# Altium PCB IndAlarmIf2.PCBDOC (part 2 of 2)
Units mil, origin at the board's own origin, x right, y up, seen from the top; angles counter-clockwise.
Board outline 5790 x 4460 mil, 2 copper layers (Top Layer, Bottom Layer); 118 components, 184 nets, 640 pads, 242 vias.
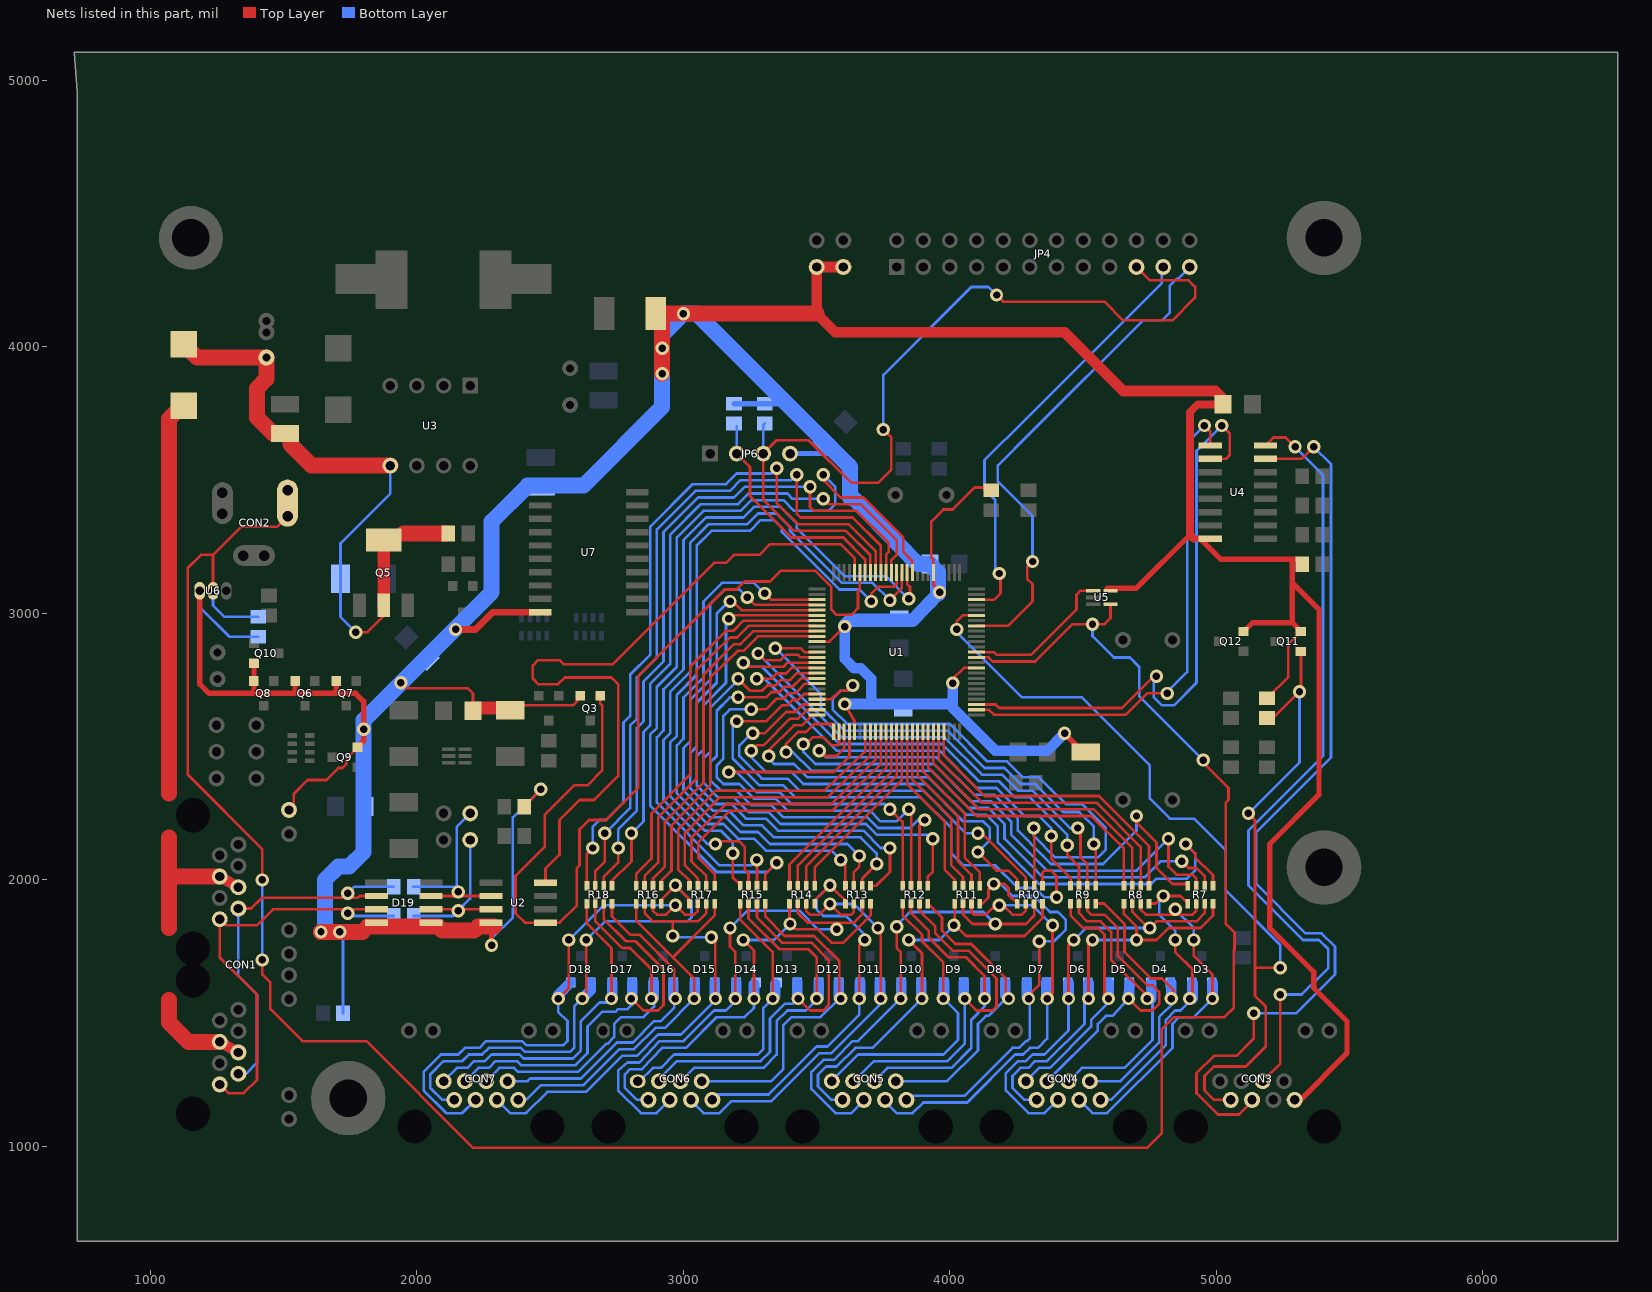
[diagram p2: the nets of this part, all layers, seen from the top]

## Via types
v1: diameter 50, hole 28, Top Layer to Bottom Layer, 242 vias

## Nets (pads, with @x,y where several pads share a name; then routed paths per layer and width w, separated by ;. In a path a pad name is that pad's centre, name@x,y a point inside that pad or via, vN(x,y) a via of type N, cw(c..) or ccw(c..) an arc to the next point about the centre after c; other vN are vias at no path point) (continued)
RXD: Q3.1 U1.45 U2.1 | length 3507.4
  Top Layer w10: Q3.1@2687.4,2696.26 2687.4,2662.6 2695,2655 2695,2410 2640,2355 2590,2355 2480,2245 2480,2125 2370,2015 2370,1980 2370,1875 2405,1840 U2.1@2482.36,1840 2535,1840 2600,1905 2600,2045 2610,2055 2610,2190 2645,2225 2710,2225 2830,2345 2830,2765 3155,3090 3200,3090 3230,3120 3325,3120 3365,3160 3495,3160 3555,3100 3555,3015 3575,2995 3630,2995 3655,3020 3655,3085.59 3662.2,3092.8 U1.45@3662.2,3154.21
RXD2: U1.2 U4.9 | length 1903.5
  Top Layer w10: U1.2@4099.21,2638.46 4146.54,2638.46 4165,2620 4630,2620 4660,2620 4740,2700 v1(4815,2700) ; v1(4955,3705) 4976.65,3683.35 U4.9@4976.65,3630
  Bottom Layer w10: v1(4815,2700) 4815,2705 4890,2780 4890,3640 v1(4955,3705)
RXDE: CON3.4 U4.8 | length 2986.6
  Top Layer w10: CON3.4@5173.54,1244.8 5240,1311.26 v1(5240,1570) ; U4.8@5183.35,3630 5213.35,3660 5260,3660 v1(5295,3625)
  Bottom Layer w10: v1(5240,1570) 5320,1570 5420,1670 5420,1740 5385,1775 5325,1775 5120,1980 5120,2185 5400,2465 5400,3520 v1(5295,3625)
RXDT: CON2.1 CON2.1A CON2.1B R3.1 U1.12 U5.4 U6.2 | length 9226.3
  Top Layer w10: U6.2@1235,3085 1235,3220 ; v1(1420,1700) 1420,1645 1450,1615 1450,1515 1570,1395 1810,1395 2210,995 4740,995 4795,1050 4795,1440 4840,1485 5030,1485 5065,1520 5065,1735 5067.5,1737.5 5067.5,1802.5 5035,1835 5035,2290 5045,2300 5045,2345 4950,2440 v1(4950,2450) ; v1(1420,2000) 1420,2115 1140,2395 1140,3170 1190,3220 1235,3220 ; CON2.1A@1514.37,3364.8 1474.37,3324.8 1339.8,3324.8 1235,3220 ; U1.12@4099.21,2835.31 4144.69,2835.31 4160,2820 4320,2820 4460,2960 4580,2960 4602.48,2982.48 U5.4@4602.48,3034.41
  Bottom Layer w10: U6.2@1235,3085 1235,3030 1277.6,2987.4 R3.1@1405,2987.4 ; v1(1420,1700) v1(1420,2000) ; v1(4535,2960) 4535,2915 4615,2835 4675,2835 4710,2800 4710,2690 v1(4950,2450)
S0A: R7.8 U1.78 | length 2046.3
  Top Layer w10: v1(3510,2485) 3530,2465 3575,2465 3603.15,2493.15 U1.78@3603.15,2555.79 ; v1(4700,2240) 4700,2215 4775,2140 4775,2045 4835,1985 4886.22,1985 R7.8@4892.76,1978.46
  Bottom Layer w10: v1(3510,2485) 3535,2460 3950,2460 4090,2320 4165,2320 4225,2260 4255,2230 4255,2185 4350,2090 4380,2060 4575,2060 4700,2185 v1(4700,2240)
S0AE: CON4.1 D3.2 R7.1 R8.8 | length 1274.2
  Top Layer w10: R8.8@4747.24,1911.54 4771.53,1911.54 v1(4800,1940) 4864.29,1940 R7.1@4892.76,1911.54 ; v1(4845,1775) 4845,1730 4910,1665 v1@4910,1555
  Bottom Layer w10: CON4.1@4563.5,1174.8 4564.8,1174.8 CON4.1@4580,1190 ; CON4.1@4569.8,1174.8 CON4.1@4565.2,1174.8 4604.8,1174.8 4810,1380 4810,1475 4845,1510 4865,1510 4910,1555 v1@4910,1540 ; v1(4800,1940) 4785,1925 4785,1870 4845,1810 v1(4845,1775) ; D3.2@4907.6,1615.79 D3.2@4910,1613.39
  Bottom Layer w40: v1@4910,1555 D3.2@4910,1613.39
  other v1: 4900,1555
S0B: R9.1 U1.63 | length 1888.3
  Top Layer w10: v1(3345,2870) 3440,2870 3455,2855 U1.63@3500.79,2855 ; v1(4540,2135) 4547.24,2127.76 4547.24,2067.24 R9.1@4547.24,1978.46
  Bottom Layer w10: v1(3345,2870) 3515,2700 3515,2650 3605,2560 3990,2560 4130,2420 4205,2420 4265,2360 4320,2360 4425,2255 4485,2255 4540,2200 v1(4540,2135)
S0BE: CON4.2 D4.1 R9.8 | length 1090.8
  Top Layer w10: R9.8@4547.24,1911.54 4578.47,1911.54 4655,1835 4655,1730 4755,1630 4795,1630 4840,1585 v1@4840,1555
  Bottom Layer w10: CON4.2@4523.5,1244.8 CON4.2@4523.5,1246.5 ; CON4.2@4525.2,1244.8 4639.8,1244.8 4785,1390 4785,1485 4840,1540 v1@4840,1555 ; D4.1@4827.4,1615.79 D4.1@4830,1613.19
  Bottom Layer w40: v1(4830,1555) D4.1@4830,1613.19
S0IN: R8.1 U1.97 | length 1148.2
  Top Layer w10: U1.97@3977.17,2555.79 3977.17,2467.83 4130,2315 4560,2315 4747.24,2127.76 R8.1@4747.24,1978.46
S1A: R7.7 U1.77 | length 2123.2
  Top Layer w10: v1(3450,2510) 3460,2510 3485,2535 3525,2535 3555,2505 3570,2505 3580,2505 3583.46,2508.46 U1.77@3583.46,2555.79 ; v1(4820,2155) 4820,2050 4850,2020 4910,2020 4924.25,2005.75 R7.7@4924.25,1978.46
  Bottom Layer w10: v1(3450,2510) 3450,2480 3495,2435 3940,2435 4080,2295 4155,2295 4215,2235 4230,2220 4230,2170 4325,2075 4365,2035 4700,2035 v1(4820,2155)
S1AE: CON4.3 D3.1 R7.2 R8.7 | length 1483.8
  Top Layer w10: R8.7@4715.75,1911.54 4715,1890 4735,1870 4910,1870 4924.25,1884.25 R7.2@4924.25,1911.54 ; v1(4915,1775) 4915,1715 4985,1645 v1(4985,1555)
  Bottom Layer w10: CON4.3@4483.5,1174.8 CON4.3@4485.2,1174.8 4535,1125 4590,1125 4835,1370 4835,1460 4860,1485 4915,1485 v1(4985,1555) ; v1(4845,1890) 4915,1820 v1(4915,1775) ; D3.1@4982.4,1615.79 4985,1613.19 D3.1@4982.4,1615.79
  Bottom Layer w40: v1(4985,1555) D3.1@4985,1613.19
S1B: R9.2 U1.64 | length 1946.1
  Top Layer w10: v1(3280,2850) 3305,2825 3365,2825 3385,2845 3430,2845 3439.69,2835.31 U1.64@3500.79,2835.31 ; v1(4480,2195) 4490,2185 4490,2085 4515.75,2059.25 R9.2@4515.75,1978.46
  Bottom Layer w10: v1(3280,2850) 3595,2535 3980,2535 4120,2395 4195,2395 4255,2335 4310,2335 4355,2290 4450,2195 v1(4480,2195)
S1BE: CON4.6 D5.1 R9.7 | length 1184.8
  Top Layer w10: R9.7@4515.75,1911.54 4515.75,1884.25 4530,1870 4580,1870 4630,1820 4630,1715 4740,1605 4760,1605 4785,1580 4785,1535 4760,1510 4715,1510 v1(4670,1555)
  Bottom Layer w10: CON4.6@4365.2,1244.8 4365.2,1245.2 4555,1435 4555,1460 4585,1490 4610,1490 v1(4670,1555) ; D5.1@4672.4,1615.79 D5.1@4675,1613.19
  Bottom Layer w40: v1(4670,1555) D5.1@4675,1613.19
S1IN: R8.2 U1.96 | length 1143.3
  Top Layer w10: U1.96@3957.48,2555.79 3957.48,2452.52 4120,2290 4550,2290 4715.75,2124.25 R8.2@4715.75,1978.46
S2A: R7.6 U1.76 | length 2168.8
  Top Layer w10: v1@3385,2460 3385,2510 3430,2555 3460,2555 3490,2585 3560,2585 3563.78,2581.22 U1.76@3563.78,2555.79 ; v1(4870,2070) 4895,2045 4925,2045 4956,2014 R7.6@4956,1978
  Bottom Layer w10: v1(3385,2480) 3410,2480 3480,2410 3930,2410 4070,2270 4145,2270 4205,2210 4205,2155 4300,2060 4350,2010 4730,2010 4790,2070 v1(4870,2070)
S2AE: CON4.5 D6.2 R7.3 R8.6 | length 1749.2
  Top Layer w10: v1(4445,1555) 4445,1745 4445,1755 v1(4465,1775) ; R8.6@4684,1912 4684,1881 4745,1820 v1(4750,1820) ; v1@4740,1820 v1(4750,1820) ; R7.3@4955.75,1911.54 4955.75,1875.75 4925,1845 4775,1845 v1(4750,1820)
  Bottom Layer w10: CON4.5@4403.5,1153.5 CON4.5@4403.5,1174.8 ; CON4.5@4405.2,1174.8 4404.8,1174.8 4355,1125 4295,1125 4210,1210 4210,1275 4255,1320 4285,1320 4310,1345 4355,1345 4445,1435 v1(4445,1555) ; D6.2@4442.6,1615.79 D6.2@4445,1613.39 ; v1(4465,1775) 4510,1820 v1(4750,1820)
  Bottom Layer w40: v1(4445,1555) D6.2@4445,1613.39
S2B: R9.3 U1.65 | length 2008.8
  Top Layer w10: v1@3215,2825 3240,2800 3375,2800 3390.63,2815.63 U1.65@3500.79,2815.63 ; v1(4440,2130) 4440,2095 4470,2065 4484.25,2050.75 R9.3@4484.25,1978.46
  Bottom Layer w10: v1@3215,2825 3240,2800 3295,2800 3585,2510 3970,2510 4110,2370 4185,2370 4245,2310 4300,2310 4345,2265 4440,2170 v1(4440,2130)
  other v1: 3225,2815
S2BE: CON4.4 D4.2 R9.6 | length 1117.5
  Top Layer w10: R9.6@4484,1912 4484,1876 4515,1845 4565,1845 4605,1805 4605,1700 v1@4750,1555
  Bottom Layer w10: CON4.4@4430,1260 4443.5,1246.5 CON4.4@4443.5,1244.8 ; CON4.4@4445.2,1244.8 4445.2,1245.2 4495,1295 4655,1295 4760,1400 4760,1545 v1@4750,1555 ; D4.2@4752.6,1615.79 D4.2@4755,1613.39
  Bottom Layer w40: v1@4755,1555 D4.2@4755,1613.39
  other v1: 4740,1555
S2IN: R8.3 U1.95 | length 1138.4
  Top Layer w10: U1.95@3937.8,2555.79 3937.8,2437.2 3990,2385 4110,2265 4540,2265 4684.25,2120.75 R8.3@4684.25,1978.46
S3A: R7.5 U1.75 | length 2430.1
  Top Layer w10: v1(3320,2465) 3320,2485 3415,2580 3445,2580 3483.78,2618.78 U1.75@3500.79,2618.78 ; v1(4885,2135) 4920,2100 4920,2085 4987.24,2017.76 R7.5@4987.24,1978.46
  Bottom Layer w10: v1(3320,2465) 3320,2455 3340,2435 3415,2435 3465,2385 3920,2385 4060,2245 4135,2245 4180,2200 4180,2140 4275,2045 4335,1985 4755,1985 4775,2005 4890,2005 4920,2035 4920,2100 v1(4885,2135)
S3AE: CON4.7 D6.1 R7.4 R8.5 | length 1584.8
  Top Layer w10: v1(4520,1555) 4520,1750 4520,1760 v1(4535,1775) ; R8.5@4652.76,1911.54 4652.76,1872.24 4700,1825 v1(4700,1775) 4775,1775 4820,1820 4940,1820 4987.24,1867.24 R7.4@4987.24,1911.54
  Bottom Layer w10: CON4.7@4325.2,1174.8 4280.2,1174.8 4235,1220 4235,1265 4265,1295 4295,1295 4320,1320 4365,1320 4505,1460 4505,1540 v1(4520,1555) ; D6.1@4517.4,1615.79 D6.1@4520,1613.19 ; v1(4535,1775) v1(4700,1775)
  Bottom Layer w40: v1(4520,1555) D6.1@4520,1613.19
S3B: R9.4 U1.66 | length 1826.4
  Top Layer w10: v1(3275,2755) 3330,2755 3350,2775 3385,2775 3405.94,2795.94 U1.66@3500.79,2795.94 ; v1(4380,2165) 4380,2080 4452.76,2007.24 R9.4@4452.76,1978.46
  Bottom Layer w10: v1(3275,2755) 3305,2755 3575,2485 3960,2485 4100,2345 4175,2345 4235,2285 4280,2240 4335,2240 4380,2195 v1(4380,2165)
S3BE: CON4.8 D5.2 R9.5 | length 982.8
  Top Layer w10: R9.5@4452.76,1911.54 4452.76,1867.24 4500,1820 4555,1820 4580,1795 4580,1570 v1(4595,1555)
  Bottom Layer w10: CON4.8@4283.5,1244.8 CON4.8@4289.8,1244.8 ; CON4.8@4285.2,1244.8 4285.2,1245.2 4335,1295 4375,1295 4530,1450 4530,1475 4595,1540 v1(4595,1555) v1@4600,1555 ; D5.2@4595,1613.19 D5.2@4597.6,1615.79
  Bottom Layer w40: v1(4595,1555) D5.2@4595,1613.19
S3IN: R8.4 U1.94 | length 1133.5
  Top Layer w10: U1.94@3918.11,2555.79 3918.11,2421.89 3980,2360 4100,2240 4530,2240 4652.76,2117.24 R8.4@4652.76,1978.46
S4A: R10.8 U1.74 | length 1681.9
  Top Layer w10: v1(3255,2485) 3275,2505 3300,2505 3400,2605 3430,2605 3463.46,2638.46 U1.74@3500.79,2638.46 ; v1(4105,2105) 4175,2035 4220,2035 4252.76,2002.24 R10.8@4252.76,1978.46
  Bottom Layer w10: v1@3255,2465 v1(3255,2485) 3255,2460 3310,2405 3405,2405 3450,2360 3910,2360 4050,2220 4125,2220 4150,2195 4150,2150 v1(4105,2105)
S4AE: CON5.1 D7.2 R10.1 R11.8 | length 1718.6
  Top Layer w10: R11.8@4112.24,1911.54 4121.53,1911.54 4145,1935 4145,1965 v1(4165,1985) 4205,1985 4220,1970 4220,1944.29 R10.1@4252.76,1911.54 ; v1@4285,1555 4335,1605 v1(4335,1770)
  Bottom Layer w10: CON5.1@3836.85,1174.8 3836.85,1176.85 3850,1190 4055,1190 4235,1370 4260,1370 4285,1395 4290,1395 4300,1405 4300,1540 v1@4285,1555 ; v1(4165,1985) 4190,1985 4235,1940 4315,1940 4375,1880 4405,1880 4435,1850 4435,1815 4390,1770 v1(4335,1770)
  Bottom Layer w40: v1@4287.6,1562.4 D7.2@4287.6,1615.79
  other v1: 4295,1555
S4B: R12.1 U1.67 | length 1916.6
  Top Layer w10: v1(3205,2755) 3250,2710 3295,2710 3315,2730 3345,2730 3365,2750 3400,2750 3426.26,2776.26 U1.67@3500.79,2776.26 ; R12.1@3917.24,1978.46 3917.24,2012.24 3935,2030 v1(3935,2155)
  Bottom Layer w10: v1(3205,2755) 3205,2750 3100,2645 3100,2480 3075,2455 3075,2365 3130,2310 3190,2310 3245,2255 3320,2255 3365,2210 3685,2210 3725,2170 3920,2170 v1(3935,2155)
S4BE: CON5.2 D8.1 R12.8 | length 1161.3
  Top Layer w10: R12.8@3917.24,1911.54 3970,1858.78 3970,1810 4020,1760 4080,1760 4210,1630 v1@4210,1555
  Bottom Layer w10: CON5.2@3796.85,1244.8 3989.8,1244.8 4105,1360 4105,1460 4135,1490 4145,1490 v1@4210,1555
  Bottom Layer w40: v1@4207.4,1567.6 D8.1@4207.4,1615.79
  other v1: 4220,1555
S4IN: R11.1 U1.93 | length 665.9
  Top Layer w10: U1.93@3898.43,2555.79 3898.43,2406.57 4055,2250 4055,2085 4112.24,2027.76 R11.1@4112.24,1978.46
S5A: R10.7 U1.73 | length 1688.9
  Top Layer w10: v1(3260,2550) 3305,2550 3385,2630 3420,2630 3448.15,2658.15 U1.73@3500.79,2658.15 ; v1(4105,2175) 4120,2175 4284.25,2010.75 R10.7@4284.25,1978.46
  Bottom Layer w10: v1(3260,2550) 3255,2550 3210,2505 3210,2465 3295,2380 3390,2380 3435,2335 3900,2335 4030,2205 4060,2175 v1(4105,2175)
S5AE: CON5.3 D7.1 R10.2 R11.7 | length 1773
  Top Layer w10: R11.7@4080.75,1911.54 4080.75,1879.25 4090,1870 4135,1870 4170,1905 4200,1905 4235,1870 4270,1870 4284.25,1884.25 R10.2@4284.25,1911.54 ; v1(4365,1555) 4385,1575 v1(4385,1830)
  Bottom Layer w10: CON5.3@3756.85,1174.8 3756.85,1168.15 3800,1125 3860,1125 3900,1165 4065,1165 4245,1345 4275,1345 4300,1370 4330,1370 4365,1405 v1(4365,1555) ; v1(4185,1905) 4300,1905 4310,1905 v1(4385,1830)
  Bottom Layer w40: v1@4362.4,1557.6 D7.1@4362.4,1615.79
S5B: R12.2 U1.68 | length 1843
  Top Layer w10: v1(3205,2685) 3310,2685 3330,2705 3360,2705 3380,2725 3410,2725 3441.57,2756.57 U1.68@3500.79,2756.57 ; R12.2@3885.75,1978.46 3885.75,2205.75 v1(3905,2225)
  Bottom Layer w10: v1(3205,2685) 3175,2685 3125,2635 3125,2465 3100,2440 3100,2375 3140,2335 3200,2335 3255,2280 3330,2280 3375,2235 3690,2235 3730,2195 3850,2195 3880,2225 v1(3905,2225)
S5BE: CON5.6 D9.1 R12.7 | length 1390.8
  Top Layer w10: R12.7@3885.75,1911.54 3885.75,1884.25 3945,1825 3945,1800 4010,1735 4070,1735 4175,1630 4175,1525 4160,1510 4100,1510 v1(4055,1555)
  Bottom Layer w10: CON5.6@3636.85,1244.8 3639.8,1244.8 3715,1320 3990,1320 4055,1385 v1(4055,1555)
  Bottom Layer w40: v1@4052.4,1557.6 D9.1@4052.4,1615.79
S5IN: R11.2 U1.92 | length 661
  Top Layer w10: U1.92@3878.74,2555.79 3878.74,2391.26 4030,2240 4030,2070 4080.75,2019.25 R11.2@4080.75,1978.46
S6A: R10.6 U1.72 | length 2143.8
  Top Layer w10: U1.72@3500.79,2677.83 3552.83,2677.83 3565,2690 3570,2690 3590,2710 3615,2710 v1(3635,2730) ; v1(4315,2195) 4316,2194 4316,2019 R10.6@4316,1978
  Bottom Layer w10: v1(3635,2730) 3615,2710 3590,2710 3560,2680 3560,2640 3615,2585 4000,2585 4140,2445 4215,2445 4275,2385 4335,2385 4380,2340 4435,2285 4495,2285 4585,2195 4585,2115 4555,2085 4395,2085 4315,2165 v1(4315,2195)
S6AE: CON5.5 D10.2 R10.3 R11.6 | length 1900.3
  Top Layer w10: v1(3800,1825) 3800,1745 3815,1730 v1(3815,1555) ; R11.6@4049,1912 4049,1871 4085,1835 4185,1835 4285,1835 4315.75,1865.75 R10.3@4315.75,1911.54
  Bottom Layer w10: CON5.5@3676.85,1174.8 3676.85,1171.85 3630,1125 3570,1125 3480,1215 3480,1280 3525,1325 3565,1325 3635,1395 3655,1395 v1(3815,1555) ; v1(3800,1825) 3800,1830 3850,1880 4125,1880 v1(4170,1835)
  Bottom Layer w40: v1@3817.6,1557.6 D10.2@3817.6,1615.79
S6B: R12.3 U1.69 | length 1739
  Top Layer w10: v1(3255,2640) 3310,2640 3350,2680 3355,2680 3375,2680 3395,2700 3420,2700 3456.89,2736.89 U1.69@3500.79,2736.89 ; v1(3845,2265) 3854.25,2255.75 R12.3@3854.25,1978.46
  Bottom Layer w10: v1(3255,2640) 3175,2640 3150,2615 3150,2455 3125,2430 3125,2385 3150,2360 3210,2360 3265,2305 3345,2305 3390,2260 3700,2260 3740,2220 3800,2220 v1(3845,2265)
S6BE: CON5.4 D8.2 R12.6 | length 1189.5
  Top Layer w10: R12.6@3854,1912 3854,1876 3920,1810 3920,1785 3995,1710 4060,1710 4130,1640 v1(4130,1555)
  Bottom Layer w10: CON5.4@3716.85,1244.8 3716.85,1246.85 3765,1295 4005,1295 4080,1370 4080,1475 4130,1525 v1(4130,1555)
  Bottom Layer w40: v1@4132.6,1557.6 D8.2@4132.6,1615.79
S6IN: R11.3 U1.91 | length 656.1
  Top Layer w10: U1.91@3859.06,2555.79 3859.06,2375.94 4005,2230 4005,2055 4049.25,2010.75 R11.3@4049.25,1978.46
S7A: R10.5 U1.71 | length 2168.8
  Top Layer w10: v1(3200,2595) 3310,2595 3370,2655 3390,2655 3410,2675 3430,2675 3452.52,2697.52 U1.71@3500.79,2697.52 ; R10.5@4347.24,1978.46 4347.24,2027.76 4347.76,2027.76 4355,2035 4380,2035 4400,2015 v1(4400,1935)
  Bottom Layer w10: v1(3200,2595) 3185,2580 3185,2455 3285,2355 3375,2355 3420,2310 3890,2310 4005,2195 4005,2100 4050,2055 4145,2055 4170,2055 4255,1970 4320,1970 4355,1935 v1(4400,1935)
S7AE: CON5.7 D10.1 R10.4 R11.5 | length 1665.5
  Top Layer w10: v1(3845,1775) 3895,1725 v1(3895,1555) ; R11.5@4017.76,1911.54 4017.76,1832.76 4060.51,1790 4280,1790 4347.24,1857.24 R10.4@4347.24,1911.54
  Bottom Layer w10: CON5.7@3596.85,1174.8 3555.2,1174.8 3505,1225 3505,1270 3535,1300 3575,1300 3645,1370 3710,1370 v1(3895,1555) ; v1(3845,1775) 3960,1775 v1(4015,1830)
  Bottom Layer w40: v1@3892.4,1557.6 D10.1@3892.4,1615.79
S7B: R12.4 U1.79 | length 1539
  Top Layer w10: v1(3170,2405) 3565,2405 3622.83,2462.83 U1.79@3622.83,2555.79 ; v1(3775,2265) 3822.76,2217.24 R12.4@3822.76,1978.46
  Bottom Layer w10: v1(3170,2405) 3200,2405 3275,2330 3360,2330 3405,2285 3755,2285 v1(3775,2265)
S7BE: CON5.8 D9.2 R12.5 | length 1194.2
  Top Layer w10: R12.5@3822.76,1911.54 3822.76,1867.24 3895,1795 3895,1770 3975,1690 v1(3975,1555)
  Bottom Layer w10: CON5.8@3556.85,1244.8 3556.85,1246.85 3655,1345 3975,1345 4030,1400 4030,1500 v1(3975,1555)
  Bottom Layer w40: v1@3977.6,1557.6 D9.2@3977.6,1615.79
S7IN: R11.4 U1.90 | length 651.2
  Top Layer w10: U1.90@3839.37,2555.79 3839.37,2360.63 3980,2220 3980,2040 4017.76,2002.24 R11.4@4017.76,1978.46
S8A: R13.8 U1.53 | length 2064.8
  Top Layer w10: v1(3305,3075) 3328.15,3051.85 U1.53@3500.79,3051.85 ; v1(3590,2075) 3607.76,2057.24 R13.8@3607.76,1978.46
  Bottom Layer w10: v1(3305,3075) 3265,3115 3145,3115 3075,3045 3075,2760 3000,2685 3000,2530 2975,2505 2975,2325 3090,2210 3150,2210 3205,2155 3265,2155 3310,2110 3555,2110 v1(3590,2075)
S8AE: CON6.1 D11.2 R13.1 R14.8 | length 1565.4
  Top Layer w10: R14.8@3492.24,1911.54 3492.24,1922.24 3525,1955 v1(3550,1980) 3575,1955 3607.76,1922.24 R13.1@3607.76,1911.54 ; v1(3660,1555) 3660,1755 v1(3680,1775)
  Bottom Layer w10: CON6.1@3108.5,1174.8 3109.8,1174.8 3130,1195 3320,1195 3500,1375 3540,1375 3660,1495 v1(3660,1555) ; v1(3550,1980) 3500,1930 3500,1890 3525,1865 3610,1865 3680,1795 v1(3680,1775)
  Bottom Layer w40: v1@3662.6,1557.6 D11.2@3662.6,1615.79
S8B: R15.1 U1.35 | length 3106.2
  Top Layer w10: R15.1@3307.24,1978.46 3307.24,2022.24 v1(3350,2065) ; v1(3525,3520) 3525,3500 3590,3435 3675,3435 3825,3285 3825,3230 3859.06,3195.94 U1.35@3859.06,3154.21
  Bottom Layer w10: v1(3350,2065) 3315,2030 3125,2030 2875,2280 2875,2545 2900,2570 2900,2725 2975,2800 2975,3285 3075,3385 3215,3385 3255,3425 3375,3425 3415,3385 3545,3385 3570,3410 3570,3475 v1(3525,3520)
S8BE: CON6.2 D12.1 R15.8 | length 1335.8
  Top Layer w10: R15.8@3307.24,1911.54 3307.24,1862.76 3380,1790 3490,1790 3585,1695 v1@3585,1555
  Bottom Layer w10: CON6.2@3068.5,1244.8 3329.8,1244.8 3375,1290 3375,1455 3405,1485 3515,1485 v1@3585,1555
  Bottom Layer w40: v1@3582.4,1557.6 D12.1@3582.4,1615.79
  other v1: 3590,1555
S8IN: R14.1 U1.89 | length 713
  Top Layer w10: R14.1@3492.24,1978.46 3492.24,2047.24 3819.68,2374.68 U1.89@3819.68,2555.79
S9A: R13.7 U1.54 | length 2070.6
  Top Layer w10: v1(3240,3060) 3267.83,3032.17 U1.54@3500.79,3032.17 ; R13.7@3639.25,1978.46 3639.25,2029.25 3660,2050 v1(3660,2090)
  Bottom Layer w10: v1(3240,3060) 3210,3090 3155,3090 3100,3035 3100,2750 3025,2675 3025,2520 3000,2495 3000,2335 3100,2235 3160,2235 3215,2180 3280,2180 3325,2135 3615,2135 v1(3660,2090)
S9AE: CON6.3 D11.1 R13.2 R14.7 | length 1749.4
  Top Layer w10: R14.7@3460.75,1911.54 3460.75,1884.25 3475,1870 3510,1870 v1(3550,1910) 3590,1870 3630,1870 3639.25,1879.25 R13.2@3639.25,1911.54 ; v1(3730,1820) 3740,1810 v1(3740,1555)
  Bottom Layer w10: CON6.3@3028.5,1174.8 3028.5,1171.5 3075,1125 3135,1125 3180,1170 3330,1170 3510,1350 3555,1350 3740,1535 v1(3740,1555) ; v1(3550,1910) 3640,1910 v1(3730,1820)
  Bottom Layer w40: v1@3737.4,1557.6 D11.1@3737.4,1615.79
S9B: R15.2 U1.36 | length 2759.9
  Top Layer w10: R15.2@3275.75,1978.46 3275.75,2039.25 v1@3275.75,2074.25 ; U1.36@3839.37,3154.21 3839.37,3110.63 3850,3100 3850,3060 v1(3845,3055)
  Bottom Layer w10: v1(3275,2075) 3255,2055 3135,2055 2900,2290 2900,2535 2925,2560 2925,2715 3000,2790 3000,3275 3085,3360 3225,3360 3265,3400 3365,3400 3425,3340 3425,3320 3605,3140 3760,3140 v1(3845,3055)
S9BE: CON6.6 D13.1 R15.7 | length 1485.9
  Top Layer w10: R15.7@3275.75,1911.54 3275.75,1859.25 3370,1765 3480,1765 3545,1700 3545,1530 3525,1510 3475,1510 v1(3430,1555)
  Bottom Layer w10: CON6.6@2908.5,1244.8 2908.5,1253.5 2975,1320 3290,1320 3325,1355 3325,1480 3380,1535 3410,1535 v1(3430,1555)
  Bottom Layer w40: v1@3427.4,1557.6 D13.1@3427.4,1615.79
S9IN: R14.2 U1.88 | length 717.8
  Top Layer w10: R14.2@3460.75,1978.46 3460.75,2050.75 3800,2390 U1.88@3800,2555.79
S10A: R13.6 U1.55 | length 2050.2
  Top Layer w10: v1(3175,3045) 3185,3045 3217.52,3012.48 U1.55@3500.79,3012.48 ; R13.6@3671,1978 3671,2006 v1(3725,2060)
  Bottom Layer w10: v1(3175,3045) 3170,3045 3125,3000 3125,2740 3050,2665 3050,2500 3025,2475 3025,2345 3110,2260 3170,2260 3225,2205 3295,2205 3340,2160 3665,2160 3725,2100 v1(3725,2060)
S10AE: CON6.5 D14.2 R13.3 R14.6 | length 2102.7
  Top Layer w10: v1(3175,1820) 3175,1750 3195,1730 v1(3195,1555) ; R14.6@3429,1912 3429,1876 3465,1840 3640,1840 3670.75,1870.75 R13.3@3670.75,1911.54 ; v1(3575,1815) 3575,1840
  Bottom Layer w10: CON6.5@2948.5,1174.8 2898.7,1125 2840,1125 2755,1210 2755,1285 2790,1315 2835,1315 2910,1395 3000,1395 3115,1510 3160,1510 3195,1545 v1(3195,1555) 3197.6,1557.6 D14.2@3197.6,1615.79 ; v1(3175,1820) 3240,1885 3435,1885 3505,1815 v1(3575,1815)
  Bottom Layer w40: v1@3197.6,1557.6 D14.2@3197.6,1615.79
S10B: R15.3 U1.37 | length 2606.3
  Top Layer w10: v1(3120,2135) 3130,2145 3210,2145 3230,2125 3230,2040 3244.25,2025.75 3244.25,2005.75 R15.3@3244.25,1978.46 ; v1(3775,3050) 3819.68,3094.68 U1.37@3819.68,3154.21
  Bottom Layer w10: v1(3120,2135) 3090,2135 2925,2300 2925,2525 2950,2550 2950,2705 3025,2780 3025,3265 3095,3335 3240,3335 3280,3375 3350,3375 3400,3325 3400,3310 3595,3115 3710,3115 v1(3775,3050)
S10BE: CON6.4 D12.2 R15.6 | length 1303.9
  Top Layer w10: R15.6@3244,1912 3244,1856 3360,1740 3470,1740 3500,1710 v1(3500,1555)
  Bottom Layer w10: CON6.4@2988.5,1244.8 2989.8,1244.8 3040,1295 3300,1295 3350,1345 3350,1470 3390,1510 3460,1510 v1@3505,1555
  Bottom Layer w40: v1@3507.6,1557.6 D12.2@3507.6,1615.79
S10IN: R14.3 U1.87 | length 722.7
  Top Layer w10: R14.3@3429.25,1978.46 3429.25,2054.25 3780.32,2405.32 U1.87@3780.32,2555.79
S11A: R13.5 U1.56 | length 2017.2
  Top Layer w10: v1(3170,2980) 3182.8,2992.8 U1.56@3500.79,2992.8 ; R13.5@3702.24,1978.46 3723.47,1978.46 3775,2030 v1(3775,2120)
  Bottom Layer w10: v1(3170,2980) 3160,2970 3160,2740 3075,2655 3075,2490 3050,2465 3050,2355 3120,2285 3180,2285 3235,2230 3310,2230 3355,2185 3675,2185 3740,2120 v1(3775,2120)
S11AE: CON6.7 D14.1 R13.4 R14.5 | length 1777.9
  Top Layer w10: v1(3225,1775) 3265,1735 v1(3265,1555) ; R14.5@3397.76,1911.54 3397.76,1837.24 3420,1815 3505,1815 3555,1765 3600,1765 3702.24,1867.24 R13.4@3702.24,1911.54
  Bottom Layer w10: CON6.7@2868.5,1174.8 2825.2,1174.8 2780,1220 2780,1270 2800,1290 2845,1290 2920,1370 3010,1370 3125,1485 3230,1485 3265,1520 v1(3265,1555) v1@3272.4,1562.4 ; v1(3225,1775) 3340,1775 v1(3400,1835)
  Bottom Layer w40: v1(3265,1555) D14.1@3265,1608.38
S11B: R15.4 U1.38 | length 2478.9
  Top Layer w10: v1(3185,2100) 3185,2010 R15.4@3212.76,1982.24 ; v1(3705,3045) 3705,3075 3730,3100 3790,3100 3800,3110 U1.38@3800,3154.21 ; R15.4@3212.76,1982.24 R15.4@3212.76,1978.46 R15.4@3212.76,1982.24
  Bottom Layer w10: v1(3185,2100) 3185,2140 3140,2185 3080,2185 3062.5,2202.5 2950,2315 2950,2515 2975,2540 2975,2695 3050,2770 3050,3255 3105,3310 3250,3310 3290,3350 3340,3350 3370,3320 3370,3305 3585,3090 3660,3090 v1(3705,3045)
S11BE: CON6.8 D13.2 R15.5 | length 1177.4
  Top Layer w10: R15.5@3212.76,1911.54 3212.76,1852.24 3335,1730 v1(3335,1555)
  Bottom Layer w10: CON6.8@2829.8,1244.8 CON6.8@2828.5,1244.8 2834.8,1244.8 2885,1295 2915,1295 2965,1345 3280,1345 3300,1365 3300,1520 v1(3335,1555)
  Bottom Layer w40: v1@3345,1565 D13.2@3345,1608.19
S11IN: R14.4 U1.86 | length 727.6
  Top Layer w10: R14.4@3397.76,1978.46 3397.76,2057.76 3760.63,2420.63 U1.86@3760.63,2555.79
S12A: R16.8 U1.57 | length 1452.8
  Top Layer w10: R16.8@2822.76,1978.46 2822.76,2022.76 2880,2080 2880,2250 3025,2395 3025,2800 3160,2935 3186.89,2935 3225,2973.11 3278.11,2973.11 U1.57@3500.79,2973.11
S12AE: CON7.1 D15.2 R16.1 R17.8 | length 1588.7
  Top Layer w10: R16.1@2822.76,1911.54 2822.76,1847.24 3040,1630 v1(3040,1555) ; 2960,1710 3117.24,1867.24 R17.8@3117.24,1911.54
  Bottom Layer w10: CON7.1@2380.16,1174.8 2409.8,1174.8 2465,1230 2625,1230 2760,1365 2815,1365 2895,1445 2930,1445 v1(3040,1555)
  Bottom Layer w40: v1@3042.6,1557.6 D15.2@3042.6,1615.79
S12B: R18.1 U1.39 | length 2522.4
  Top Layer w10: R18.1@2732.24,1978.46 2732.24,1997.24 2805,2070 v1(2805,2175) ; v1(3525,3430) 3545,3410 3665,3410 3800,3275 3800,3220 3780.32,3200.32 U1.39@3780.32,3154.21
  Bottom Layer w10: v1(2805,2175) 2850,2220 2850,2555 2875,2580 2875,2735 2950,2810 2950,3295 3065,3410 3205,3410 3245,3450 3390,3450 3410,3430 v1(3525,3430)
S12BE: CON7.2 D16.1 R18.8 | length 1305.5
  Top Layer w10: R18.8@2732.24,1911.54 2732.24,1862.76 2800,1795 2835,1795 2965,1665 v1@2965,1555
  Bottom Layer w10: CON7.2@2340.16,1244.8 2414.8,1244.8 2425,1255 2615,1255 2750,1390 2810,1390 2890,1470 2915,1470 2965,1520 v1@2965,1555
  Bottom Layer w40: v1@2962.4,1557.6 D16.1@2962.4,1615.79
  other v1: 2970,1555
S12IN: R17.1 U1.85 | length 1114.2
  Top Layer w10: R17.1@3117.24,1978.46 3117.24,2022.76 3055,2085 3055,2140 3175,2260 3560,2260 3740.94,2435.94 U1.85@3740.94,2555.79
S13A: R16.7 U1.58 | length 1409.7
  Top Layer w10: R16.7@2854.25,1978.46 2854.25,2014.25 2905,2065 2905,2235 3050,2380 3050,2790 3175,2910 3201.57,2910 3240,2948.43 3245,2953.43 3293.43,2953.43 U1.58@3500.79,2953.43
S13AE: CON7.3 D15.1 R16.2 R17.7 | length 1846.5
  Top Layer w10: R16.2@2854.25,1911.54 2854.25,1875.75 2885,1845 3055,1845 3085.75,1875.75 R17.7@3085.75,1911.54 ; v1(2960,1790) 2960,1845 ; v1(3105,1785) 3120,1770 v1(3120,1555)
  Bottom Layer w10: CON7.3@2300.16,1174.8 2350,1125 2410,1125 2490,1205 2635,1205 2770,1340 2825,1340 2905,1420 2990,1420 3120,1550 v1(3120,1555) ; v1(2960,1790) 2965,1785 v1(3105,1785)
  Bottom Layer w40: v1@3117.4,1557.6 D15.1@3117.4,1615.79
S13B: R18.2 U1.40 | length 2580.4
  Top Layer w10: R18.2@2700.75,1978.46 2700.75,2010.75 2755,2065 v1(2755,2120) ; v1(3475,3475) 3475,3400 3490,3385 3650,3385 3760,3275 3770,3265 3770,3230 3760.63,3220.63 U1.40@3760.63,3154.21
  Bottom Layer w10: v1(2755,2120) 2755,2190 2825,2260 2825,2570 2850,2595 2850,2745 2925,2820 2925,3305 3055,3435 3190,3435 3230,3475 v1(3475,3475)
S13BE: CON7.6 D17.1 R18.7 | length 1539.6
  Top Layer w10: R18.7@2700.75,1911.54 2700.75,1854.25 2785,1770 2820,1770 2925,1665 2925,1530 2905,1510 2850,1510 v1(2805,1555)
  Bottom Layer w10: CON7.6@2180.16,1245.16 CON7.6@2180.16,1244.8 2230.35,1295 2270,1295 2295,1320 2375,1320 2390,1305 2595,1305 2640,1350 2640,1450 2695,1505 2745,1505 2755,1515 2790,1515 2805,1530 v1(2805,1555)
  Bottom Layer w40: v1@2807.4,1557.4 D17.1@2807.4,1615.79
S13IN: R17.2 U1.84 | length 1119.6
  Top Layer w10: R17.2@3085.75,1978.46 3085.75,2014.25 3030,2070 3030,2160 3160,2285 3555,2285 3721.26,2451.26 U1.84@3721.26,2555.79
S14A: R16.6 U1.59 | length 1363.9
  Top Layer w10: R16.6@2886,1978 2886,2006 2930,2050 2930,2220 3075,2365 3075,2770 3190,2885 3215,2885 3263.74,2933.74 U1.59@3500.79,2933.74
S14AE: CON7.5 D18.2 R16.3 R17.6 | length 2130.7
  Top Layer w10: v1(2530,1555) 2570,1595 v1(2570,1775) ; R16.3@2885.75,1911.54 2885.75,1884.25 2900,1870 2935,1870 v1(2970,1905) 3005,1870 3040,1870 3054,1884 R17.6@3054,1912
  Bottom Layer w10: CON7.5@2220.16,1174.8 2219.8,1174.8 2170,1125 2110,1125 2025,1210 2025,1280 2090,1345 2155,1345 2180,1370 2235,1370 2260,1395 2395,1395 2410,1380 2550,1380 2565,1395 2565,1470 2530,1505 v1(2530,1555) v1@2530,1568.19 ; v1(2570,1775) 2700,1905 v1(2970,1905)
  Bottom Layer w40: v1@2530,1568.19 D18.2@2577.6,1615.79
S14B: R18.3 U1.41 | length 2652.9
  Top Layer w10: R18.3@2669.25,1978.46 2669.25,2034.25 2705,2070 v1(2705,2175) ; v1(3425,3520) 3425,3375 3440,3360 3634.68,3360 3740.63,3254.06 3740.94,3254.06 U1.41@3740.94,3154.21
  Bottom Layer w10: v1(2705,2175) 2800,2270 2800,2579.75 2825,2604.75 2825,2760 2900,2835 2900,3315 3045,3460 3175,3460 3215,3500 3405,3500 v1(3425,3520)
S14BE: CON7.4 D16.2 R18.6 | length 1333.2
  Top Layer w10: R18.6@2669,1912 2669,1846 2770,1745 2800,1745 2880,1665 v1(2880,1555)
  Bottom Layer w10: CON7.4@2260.16,1244.8 2260.16,1245.16 2310,1295 2365,1295 2380,1280 2605,1280 2710,1385 ; 2715,1385 2740,1410 2740,1460 2765,1485 2850,1485 2890,1525 v1@2890,1555
  Bottom Layer w40: v1@2887.6,1557.4 D16.2@2887.6,1615.79
S14IN: R17.3 U1.83 | length 1123.6
  Top Layer w10: R17.3@3054.25,1978.46 3054.25,2005.75 3005,2055 3005,2175 3135,2310 3540,2310 3701.57,2466.57 U1.83@3701.57,2555.79
S15A: R16.5 U1.60 | length 1319
  Top Layer w10: R16.5@2917.24,1978.46 2917.24,1997.24 2955,2035 2955,2205 3100,2355 3100,2760 3205,2860 3225,2860 3279.05,2914.05 U1.60@3500.79,2914.05
S15AE: CON7.7 D18.1 R16.4 R17.5 | length 2006.3
  Top Layer w10: v1(2620,1555) 2635,1570 v1(2635,1775) ; R16.4@2917.24,1911.54 2917.24,1927.24 v1(2970,1980) 3022.76,1927.24 R17.5@3022.76,1911.54
  Bottom Layer w10: CON7.7@2140.16,1174.8 2095.2,1174.8 2050,1220 2050,1270 2100,1320 2170,1320 2195,1345 2245,1345 2270,1370 2390,1370 2405,1355 2575,1355 2590,1370 2590,1525 v1(2620,1555) ; v1(2635,1775) 2705,1845 3015,1845 3030,1860 3030,1920 v1(2970,1980)
  Bottom Layer w40: v1(2620,1555) 2652.4,1587.4 D18.1@2652.4,1615.79
S15B: R18.4 U1.42 | length 2681.4
  Top Layer w10: R18.4@2637.76,1978.46 2637.76,2097.76 v1(2660,2120) ; v1(3350,3545) 3350,3415 3430,3335 3619.69,3335 3720.94,3233.74 3721.26,3233.74 U1.42@3721.26,3154.21
  Bottom Layer w10: v1(2660,2120) 2660,2200 2685,2225 2710,2225 2775,2290 2775,2590 2800,2615 2800,2770 2875,2845 2875,3325 3035,3485 3160,3485 3200,3525 3330,3525 v1(3350,3545)
S15BE: CON7.8 D17.2 R18.5 | length 1291.4
  Top Layer w10: CON7.8@2100.16,1244.8 CON7.8@2100.16,1245.16 ; R18.5@2637.76,1911.54 2637.76,1837.24 2730,1745 v1(2730,1555)
  Bottom Layer w10: CON7.8@2100.16,1244.8 2150.35,1295 2190,1295 2215,1320 2255,1320 2280,1345 2385,1345 2400,1330 2585,1330 2615,1360 2615,1470 2685,1540 2720,1540 2730,1550 v1(2730,1555)
  Bottom Layer w40: v1@2732.6,1557.6 D17.2@2732.6,1615.79
S15IN: R17.4 U1.82 | length 1126
  Top Layer w10: R17.4@3022.76,1978.46 3022.76,1997.24 2980,2040 2980,2190 3120,2335 3530,2335 3681.89,2481.89 U1.82@3681.89,2555.79
SCK: CON3.7 Q11.1 R28.1 U1.20 | length 4385.2
  Top Layer w10: v1(4025,2940) 4025,2970 4047.8,2992.8 U1.20@4099.21,2992.8 ; CON3.7@5053.54,1174.8 4990.2,1174.8 4955,1210 4955,1265 4990,1300 5110,1300 5170,1360 5185,1375 5185,1525 5145,1565 5145,2225 v1(5120,2250) ; 5145,1670 v1(5240,1670) ; R28.1@5190,2607.6 5212.6,2607.6 5317.24,2712.24 Q11.1@5317.24,2857.6
  Bottom Layer w10: v1(4025,2940) 4025,2930 4270,2685 4495,2685 4750,2430 4750,2305 4825,2230 4915,2230 5035,2110 5035,1960 5240,1755 ; v1(5120,2250) 5311.64,2441.64 v1(5311.64,2706.64) ; 5225,1770 5240,1755 ; v1(5240,1670) 5240,1755
SCL: JP4.19 JP6.3 R67.1 U1.43 | length 3480.9
  Top Layer w10: U1.43@3701.57,3154.21 3701.57,3218.43 3701.26,3218.43 3609.68,3310 3415,3310 3300,3425 JP6.3@3300,3600 3350,3650 3470,3650 3630,3490 3730,3490 3780,3540 3780,3660 v1(3750,3690) ; v1(4175,4195) 4200,4170 4580,4170 4650,4100 4835,4100 4920,4185 4920,4225 4895,4250 4750,4250 JP4.19@4700,4300
  Bottom Layer w10: JP6.3@3300,3600 3300,3707.6 R67.1@3305,3712.6 ; v1(3750,3690) 3750,3895 4080,4225 4145,4225 v1(4175,4195)
SDA: JP6.2 R68.1 U1.44 | length 862.2
  Top Layer w10: JP6.2@3200,3600 3250,3550 3250,3440 3405,3285 3599.68,3285 3681.57,3203.11 3681.89,3203.11 U1.44@3681.89,3154.21
  Bottom Layer w10: JP6.2@3200,3600 R68.1@3200,3702.6
SPA: JP4.21 U1.23 | length 1628.6
  Top Layer w10: U1.23@4099.21,3051.85 4166.85,3051.85 4190,3075 4190,3145 v1(4185,3150)
  Bottom Layer w10: v1(4185,3150) 4180,3150 4170,3160 4170,3315 4170,3425 4130,3465 4130,3575 4285,3730 4795,4240 JP4.21@4795,4300
SPB: JP4.23 U1.18 | length 1921.3
  Top Layer w10: U1.18@4099.21,2953.43 4218.43,2953.43 4310,3045 4310,3110 4290,3130 4290,3175 v1(4310,3195)
  Bottom Layer w10: v1(4310,3195) 4310,3365 4180,3495 4180,3555 4305,3680 4725,4100 4795,4100 4825,4130 4825,4230 4850,4255 4855,4255 JP4.23@4900,4300 ; JP4.23@4890,4300 JP4.23@4895,4300
TXD: U1.46 U2.4 | length 2772.6
  Top Layer w10: U2.4@2482.36,1990 2482.36,2042.36 2535,2095 2535,2225 2610,2300 2665,2300 2755,2390 2755,2735 2730,2760 2555,2760 2530,2735 2455,2735 2435,2755 2435,2805 2455,2825 2535,2825 2550,2810 2735,2810 2785,2860 3115,3190 3160,3190 3190,3220 3285,3220 3325,3260 3590,3260 3642.52,3207.48 U1.46@3642.52,3154.21
TXD2: U1.3 U4.10 | length 2229.1
  Top Layer w10: U1.3@4099.21,2658.15 4171.85,2658.15 4185,2645 4645,2645 4765,2765 v1(4775,2765) ; U4.10@4976.65,3580 5035,3580 5050,3595 5050,3675 v1(5020,3705)
  Bottom Layer w10: v1(4775,2765) 4765,2755 4765,2685 4795,2655 4840,2655 4925,2740 4925,3610 v1(5020,3705)
TXDE: CON3.5 U4.7 | length 3589.1
  Top Layer w10: CON3.5@5133.54,1174.8 5133.54,1168.54 5085,1120 5005,1120 4925,1200 4925,1275 4990,1340 5075,1340 5140,1405 v1(5140,1500) ; U4.7@5220,3580 U4.7@5183.35,3580 5320,3580 v1(5365,3625)
  Bottom Layer w10: v1(5140,1500) 5300,1500 5445,1645 5445,1750 5395,1800 5335,1800 5150,1985 5150,2180 5430,2460 5430,3560 v1(5365,3625)
TXDT: U1.13 U5.1 | length 574.3
  Top Layer w10: U1.13@4099.21,2855 4150,2855 4165,2855 4175,2845 4305,2845 4475,3015 4475,3070 4490.59,3085.59 U5.1@4537.52,3085.59
U+: C1.1 C2.2 D2.2 Q5.2 R22.2 R32.1 U3.5 | length 2446.2
  Top Layer w10: v1(1770,2930) 1815,2930 1876.61,2991.61 Q5.2@1876.61,3029.29 ; Q5.2@1876.61,3273.39 Q5.2@1879.02,3275.79
  Top Layer w47: Q5.2@1875,3030.91 Q5.2@1875,3275
  Top Layer w60: D2.2@1125,4010 1175,3960 C1.1@1435,3960 1435,3880 1400,3845 1400,3735 1460.12,3674.88 C2.2@1505,3674.88 ; C2.2@1525,3669.88 1525,3635 1605,3555 U3.5@1900,3555 ; 1950,3300 R22.2@2110,3300
  Bottom Layer w10: v1(1770,2930) 1713.39,2986.61 R32.1@1713.39,3130 1713.39,3263.39 1900,3450 U3.5@1900,3555
UIN: CON1.4 CON1.4B CON1.5 CON1.5B D2.1 | length 2609.7
  Top Layer w40: CON1.5B@1260,1392.76 CON1.4B@1330,1352.76 ; CON1.5@1260,2012.76 CON1.4@1330,1972.76
  Top Layer w60: 1070,1550 1070,1465 1142.24,1392.76 CON1.5B@1260,1392.76 ; 1070,1820 1070,2160 ; 1070,2325 1070,3730 D2.1@1105,3765 ; 1072.24,2012.76 CON1.5@1260,2012.76
  Bottom Layer w40: CON1.5B@1260,1392.76 CON1.4B@1330,1352.76 ; CON1.5@1260,2012.76 CON1.4@1330,1972.76
VCC: C5.2 C6.2 C7.2 C8.2 C14.1 C15.1 C18.2 C20.2 C21.2 C22.2 CON1.12 CON3.1 D19.1 D19.8 F1.2 JP6.4 L2.1 pad.2 pad.3 Q3.2 Q6.2 Q7.2 Q8.2 Q9.2 Q10.2 Q11.2 Q12.2 R1.2 R3.2 R6.1 R21.2 R24.2 R28.2 R67.2 R68.2 U1.10 U1.31 U1.61 U1.80 U2.8 U4.16 U5.5 U6.3 U7.20 | length 20074.7
  Top Layer w10: CON1.12@1537.8,2262.76 1537.8,2322.8 1590,2375 1660,2375 1705,2420 1720,2420 1735,2435 1735,2455 1776.26,2496.26 Q9.2@1776.26,2497.4 ; v1(1940,2740) 1960,2720 2190,2720 2210.12,2699.88 C18.2@2210.12,2635 ; 2280,1820 2290,1825 ; R24.2@2368.39,2655 2585,2655 2612.6,2682.6 Q3.2@2612.6,2696.26 ; R6.1@2402.4,2275 v1(2465,2340) ; U1.61@3500.79,2894.37 3548.37,2894.37 v1(3605,2951) ; v1(3605,2660) 3642.52,2594.48 U1.80@3642.52,2555.79 ; U1.31@3937.8,3154.21 3937.8,3202.2 3930,3210 3930,3310 3930,3345 3975,3390 4010,3390 4092.4,3472.4 R1.2@4155,3472.4 ; v1(4010,2739) 4010,2754 4051.94,2795.94 U1.10@4099.21,2795.94 ; R28.2@5190,2682.4 5270,2762.4 5270,2885 Q11.2@5317.24,2932.24
  Top Layer w11: U1.31@3937.8,3154.21 3937.8,3108.2 v1(3961,3080)
  Top Layer w20: U6.3@1185,3085 1185,2735 1220,2700 1770,2700 1800,2670 1800,2625 1800,2521.14 Q9.2@1776.26,2497.4 ; 1388.74,2701.26 Q10.2@1388.74,2812.6 ; 1542.6,2702.4 Q6.2@1542.6,2746.26 ; 1697.6,2702.4 Q7.2@1697.6,2746.26 ; v1(2280,1755) 2280,1820 ; v1(4430,2550) 4499.88,2480.12 L2.1@4510,2480.12 ; 4590,3095 4700,3095 4900,3295 ; U4.16@4940,3280 5016,3204 5303.6,3204 C14.1@5322.6,3185 ; Q12.2@5102.4,2932.4 5135,2965 5284.65,2965 ; 5284.65,3115 5385,3014.64 5385,2320 5200,2135 5200,1820 5365,1655 5365,1595 5490,1470 5490,1350 5314.8,1174.8 CON3.1@5293.54,1174.8 ; 5284.65,3203.64 5284.65,2965 ; Q11.2@5317.24,2932.24 Q11.2@5317.24,2932.4 5284.65,2965
  Top Layer w23: 4913.93,3281.07 U4.16@4940,3280
  Top Layer w25: v1(2145,2940) 2220,2940 2285,3005 U7.20@2462.91,3005
  Top Layer w30: 4913.93,3281.07 4900,3295 ; C15.1@5024.88,3785 4930,3785 4900,3755 4900,3310 ; 4900,3295 4900,3310 ; 4900,3295 4900,3310
  Top Layer w40: pad.3@3600,4300 pad.2@3500,4300 3500,4125 3570,4055 4430,4055 4650,3835 4995,3835 5024.88,3805.12 C15.1@5024.88,3785
  Top Layer w50: C18.2@2210,2645 R24.2@2348.27,2645
  Top Layer w60: v1(1640,1805) 1795,1805 1815,1825 2080,1825 2095,1810 2215,1810 2230,1825 2290,1825 ; v1(2920,3900) 2920,4101.5 F1.2@2896.5,4125 3500,4125
  Bottom Layer w10: U6.3@1185,3085 1185,3025 1297.4,2912.6 R3.2@1405,2912.6 ; v1(1710,1805) 1722.4,1792.6 R21.2@1722.4,1500 ; v1(2280,1755) 2280,1780 2360,1860 2360,2235 v1(2465,2340) ; v1@3605,2650 v1(3605,2660) ; v1(3605,2951) v1@3605,2955 ; v1(3961,3080) v1@3966,3076
  Bottom Layer w20: R68.2@3190,3787.4 3387.6,3787.4 ; JP6.4@3400,3600 3575,3600
  Bottom Layer w40: v1(3605,2660) 3995,2660 4010,2675 ; v1(3605,2951) 3605,2830 3640,2795 3665,2795 3705,2755 3705,2660 ; v1@4010,2735 v1(4010,2739) ; v1@4011,2739 v1(4010,2739) ; 4165,2490 4010,2645 4010,2675 ; 4170.12,2485 4365,2485 v1(4430,2550) ; 4010,2675 v1(4010,2739)
  Bottom Layer w50: v1@3605,2955 3625,2975 3860,2975 v1(3961,3080)
  Bottom Layer w60: v1(1640,1805) v1(1710,1805) ; v1@1655,1820 1655,2000 1705,2050 1745,2050 1800,2105 1800,2600 2280,3080 2280,3345 2415,3480 2625,3480 2920,3775 v1(2920,3995) 2920,4045 v1(3000,4125) 3050,4125 3620.59,3554.41 ; 3625,3435 3625,3550 ; 3635,3435 3880,3185 C21.2@3924.88,3185 3955,3154.88 v1@3955,3075.46
  other v1: 1800,2565
XA: D19.3 JJ2.2 JP1.2 U2.6 | length 710.7
  Top Layer w10: D19.3@2052.36,1940 U2.6@2277.64,1940
  Bottom Layer w10: JJ2.2@1987.4,1975 v1@2155,1975 ; v1(2155,1955) 2150,1960 2150,2200 JP1.2@2200,2250
XAE: CON1.2 CON1.2B D19.6 JJ2.1 | length 1414.4
  Top Layer w10: CON1.2@1330,1892.76 1377.76,1892.76 1417.76,1932.76 1777.76,1932.76 1785,1940 D19.6@1847.64,1940
  Bottom Layer w10: CON1.2B@1330,1272.76 1357.76,1272.76 1400,1315 1400,1570 1330,1640 CON1.2@1330,1892.76 ; v1(1740,1950) 1765,1975 JJ2.1@1912.6,1975
XB: D19.2 JJ1.2 JP2.1 U2.7 | length 684.8
  Top Layer w10: D19.2@2052.36,1890 U2.7@2277.64,1890
  Bottom Layer w10: JJ1.2@1987.4,1865 2125,1865 2135,1865 v1(2155,1885) 2200,1930 JP2.1@2200,2150
XBE: CON1.1 CON1.1B D19.7 JJ1.1 | length 1633.7
  Top Layer w10: CON1.1B@1260,1232.76 1292.76,1200 1350,1200 1400,1250 1400,1570 1260,1710 CON1.1@1260,1852.76 1282.76,1830 1400,1830 1460,1890 D19.7@1847.64,1890
  Bottom Layer w10: v1(1740,1875) 1750,1865 JJ1.1@1912.6,1865
pads on no net: CON1.0@1160,1122.76 CON3.0@4903.54,1074.8 CON4.0 CON5.0 CON6.0 CON7.0 U4.12 U4.14

## Polygon pours and split planes (outlines as drawn)
UIN on Top Layer (hatched 90Degree grid 8 track 10, remove dead copper): 1045,2325 1045,2155 1095,2155 1095,2325
UIN on Top Layer (hatched 90Degree grid 8 track 10, remove dead copper): 1045,1820 1045,1555 1095,1555 1095,1820
GND on Top Layer (hatched 90Degree grid 8 track 10, remove dead copper): 4060,3115 3543.35,3115 3543.35,2600 3990,2600 3990,2490 4090,2390 4400,2390 4400,2595 4065,2595
LEDAO on Top Layer (hatched 90Degree grid 8 track 10): 2160,2495 2160,2590 2220,2590 2220,2490
LEDA on Top Layer (hatched 90Degree grid 8 track 10): 2210,2595 2210,2455 2290,2455 2290,2595
LEDAO on Top Layer (hatched 90Degree grid 8 track 10): 2100,2445 2100,2355 2110,2345 2260,2345 2300,2385 2300,2420 2150,2420 2150,2445
NetQ1_1 on Top Layer (hatched 45Degree grid 8 track 10): 1860,2520 2140,2520 2140,2480 2085,2480 2085,2385 1810,2385 1810,2420 1860,2470
VCC on Top Layer (hatched 45Degree grid 8 track 10, remove dead copper): 2160,2695 2160,2595 2305,2595 2305,2510 2420,2510 2420,2720 2185,2720
GND on Top Layer (hatched 45Degree grid 8 track 10, remove dead copper): 2155,2530 1865,2530 1865,2714.33 2165,2714.33
GND on Top Layer (hatched 45Degree grid 8 track 10, remove dead copper): 1600,1950 2460,1950 2460,2350 1600,2350
VCC on Top Layer (hatched 45Degree grid 8 track 10, remove dead copper): 1605,1890 2345,1890 2345,1705 1595,1705 1600,1700
NetC3_2 on Top Layer (hatched 45Degree grid 8 track 10, remove dead copper): 2575,3890 2300,3890 2240,3830 2175,3830 2175,4300 2235,4360 2505,4360 2505,4020 2575,3950
NetD1_2 on Top Layer (hatched 45Degree grid 8 track 10, remove dead copper): 2140,3530 2140,3600 1900,3840 1900,4070 1960,4130 1960,4360 1745,4360 1660,4275 1660,3945 2050,3555 2050,3530
GND on Top Layer (hatched 45Degree grid 8 track 10, remove dead copper): 1410,4540 1410,3700 1580,3530 2220,3530 2340,3650 2470,3650 2570,3750 2570,3950 2505,4015 2505,4540
GND on Top Layer (hatched 45Degree grid 8 track 10, remove dead copper): 4515,3030 4565,3030 4585,3050 4635,3050 4650,3035 4650,3065 4515,3065
VCC on Bottom Layer (hatched 90Degree grid 8 track 10, remove dead copper): 3985,3215 3985,2805 4050,2740 4105.95,2684.05 4250,2540 4315,2540 4390,2615 4476.16,2615 4476.16,2460 4140,2460 4005,2595 3515,2595 3515,3155 3795,3155 3830,3190
GND on Bottom Layer (hatched 45Degree grid 8 track 10): 2425,2720 2425,2370 2365,2310 1850,2310 1850,2580 1990,2720
GND on Bottom Layer (hatched 45Degree grid 8 track 10, remove dead copper): 5460,2420 5010,1970 2500,1970 2500,1520 4580,1520 5115,985 5535,985 5535,2420
GND on Bottom Layer (hatched 45Degree grid 8 track 10, remove dead copper): 2505,4540 2505,4015 2570,3950 2570,3750 2470,3650 2340,3650 2225,3535 2220,3530 1585,3530 1410,3705 1410,4545

## Keep-outs
Keep-Out Layer:
  lines w10: 1005,970 5560,970 5560,4566.93 1005,4566.93 ; 1025,970 1025,4566.93

## Other copper
Top Layer:
  rectangle net U+: 1725,3093.39 1986.61,3330

## Silkscreen, mask and mechanical layers (free items; w line width, h text height)
Top Overlay:
  text "Indasoft bt." at 2605,4485 h60
  text "IndAlarmIf2 v1.0" at 2550,4370 h60
  text "2012.03.20." at 2600,4260 h60

## Text inside footprints (layer, text, board x,y; h text height)
C1: Top Overlay "+" at 1525,3910 h60 r90
C4: Top Overlay "+" at 2485,3970 h60 r270
D22: Top Overlay "+" at 1317.97,2724.78 h40 r90
JP4: Top Overlay "1" at 3700,4280 h50; Top Overlay "2" at 3700,4380 h50; Top Overlay "23" at 4960,4280 h50; Top Overlay "24" at 4960,4380 h50
U6: Top Overlay "1" at 1313.74,3178.7 h59.05 r90; Top Overlay "3" at 1214.53,3167.28 h59.05 r90